# Altium PCB PotentiometerReceiverCircuit.PcbDoc
Units mil, origin at the board's own origin, x right, y up, seen from the top; angles counter-clockwise.
Board outline 6000 x 4000 mil, 2 copper layers (Top Layer, Bottom Layer); 34 components, 22 nets, 88 pads, 6 vias.
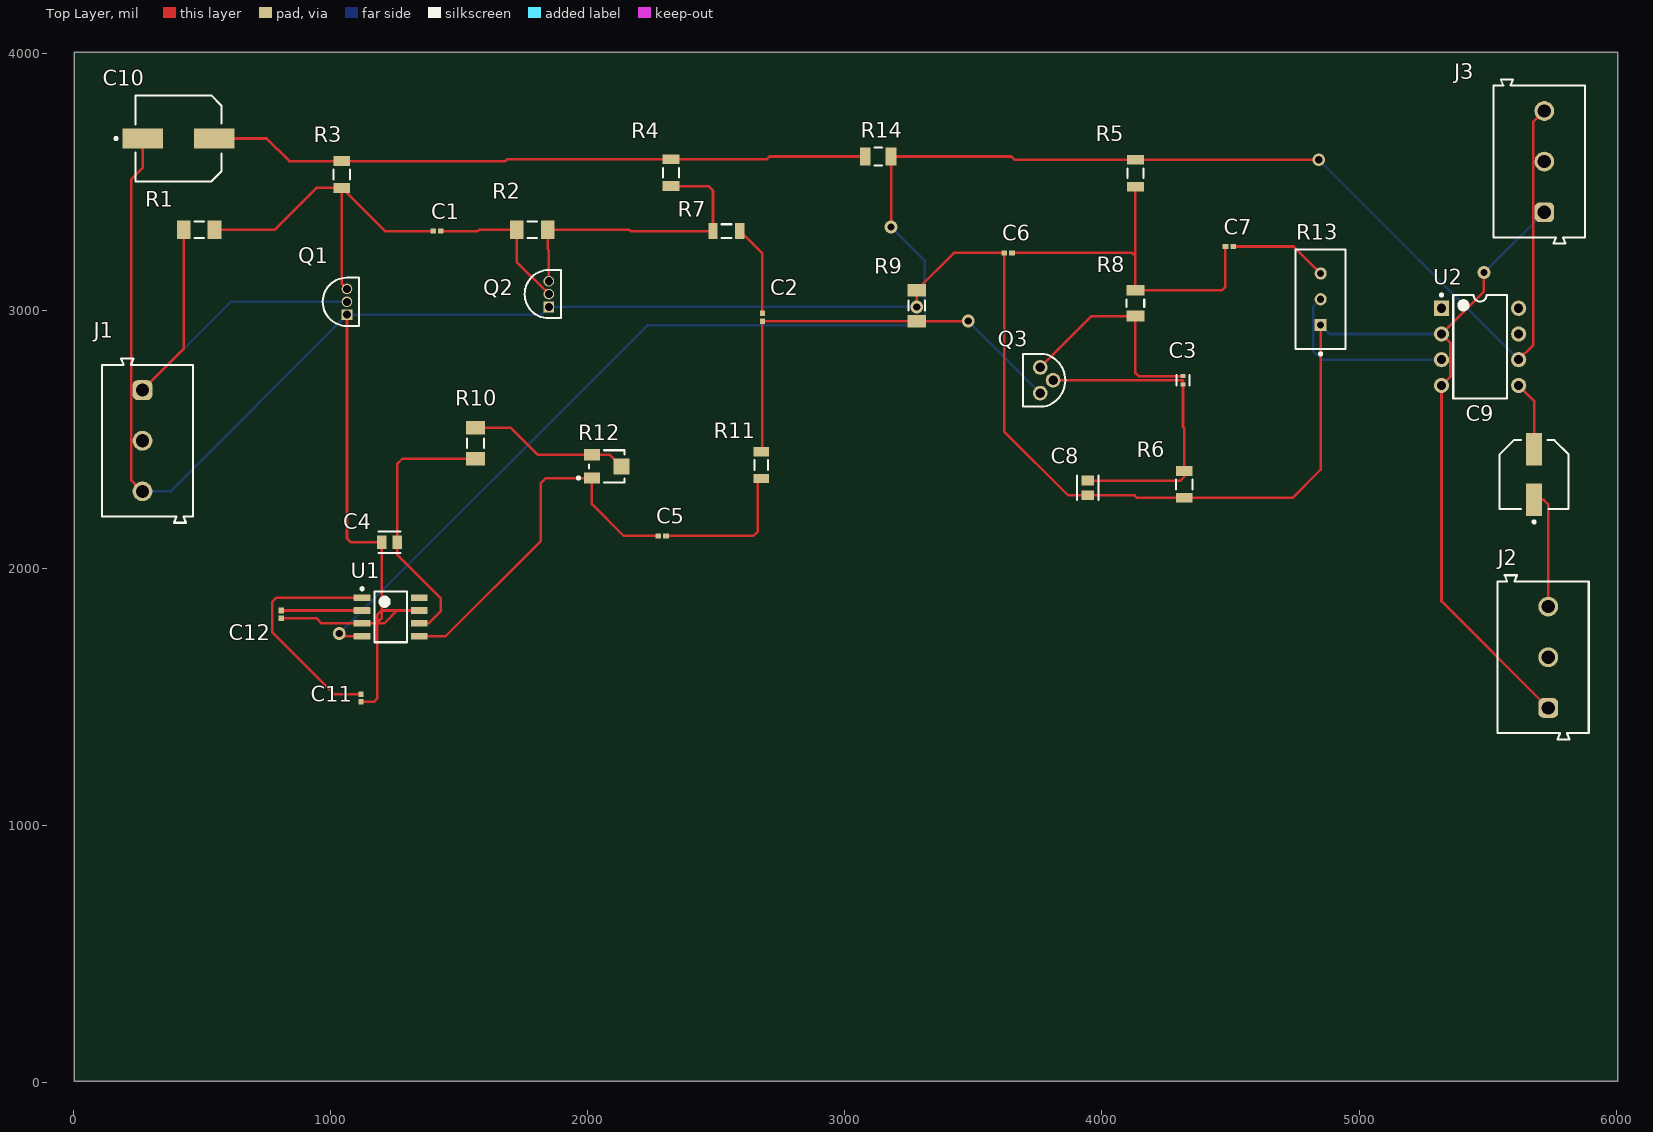
[diagram p0: Top Layer view]
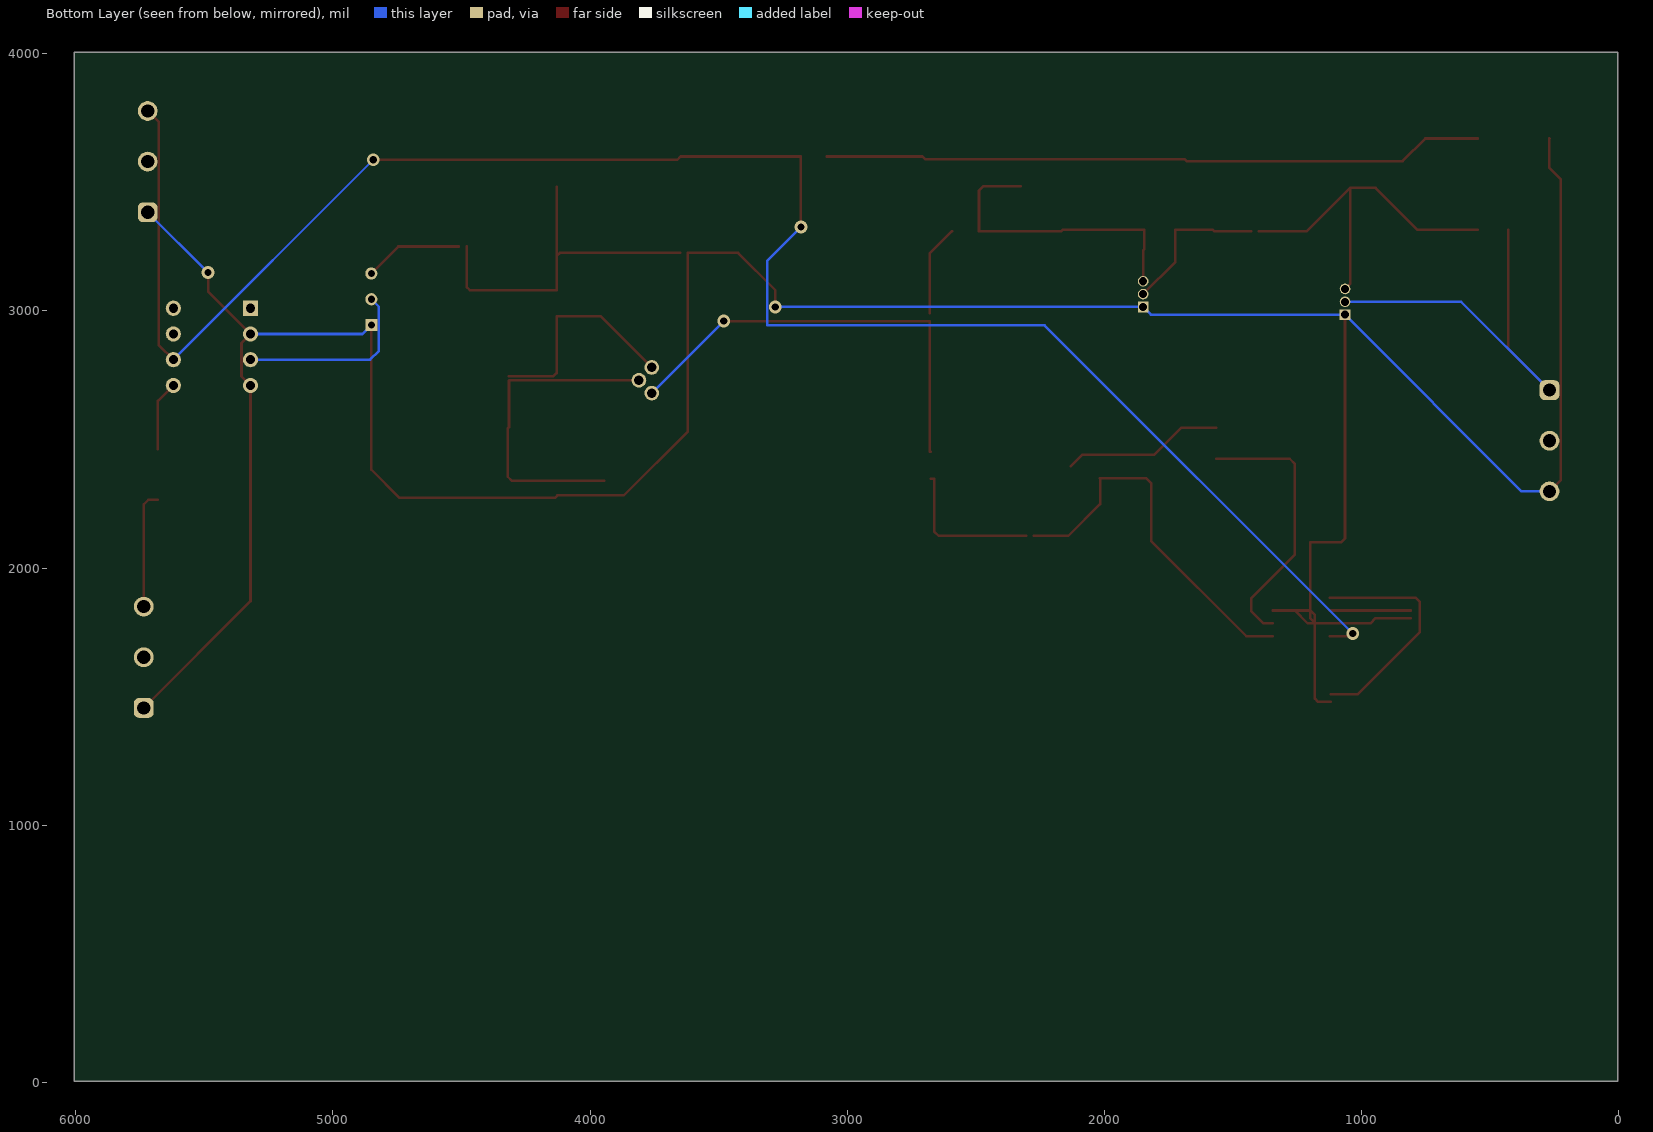
[diagram p1: Bottom Layer view, seen from below]
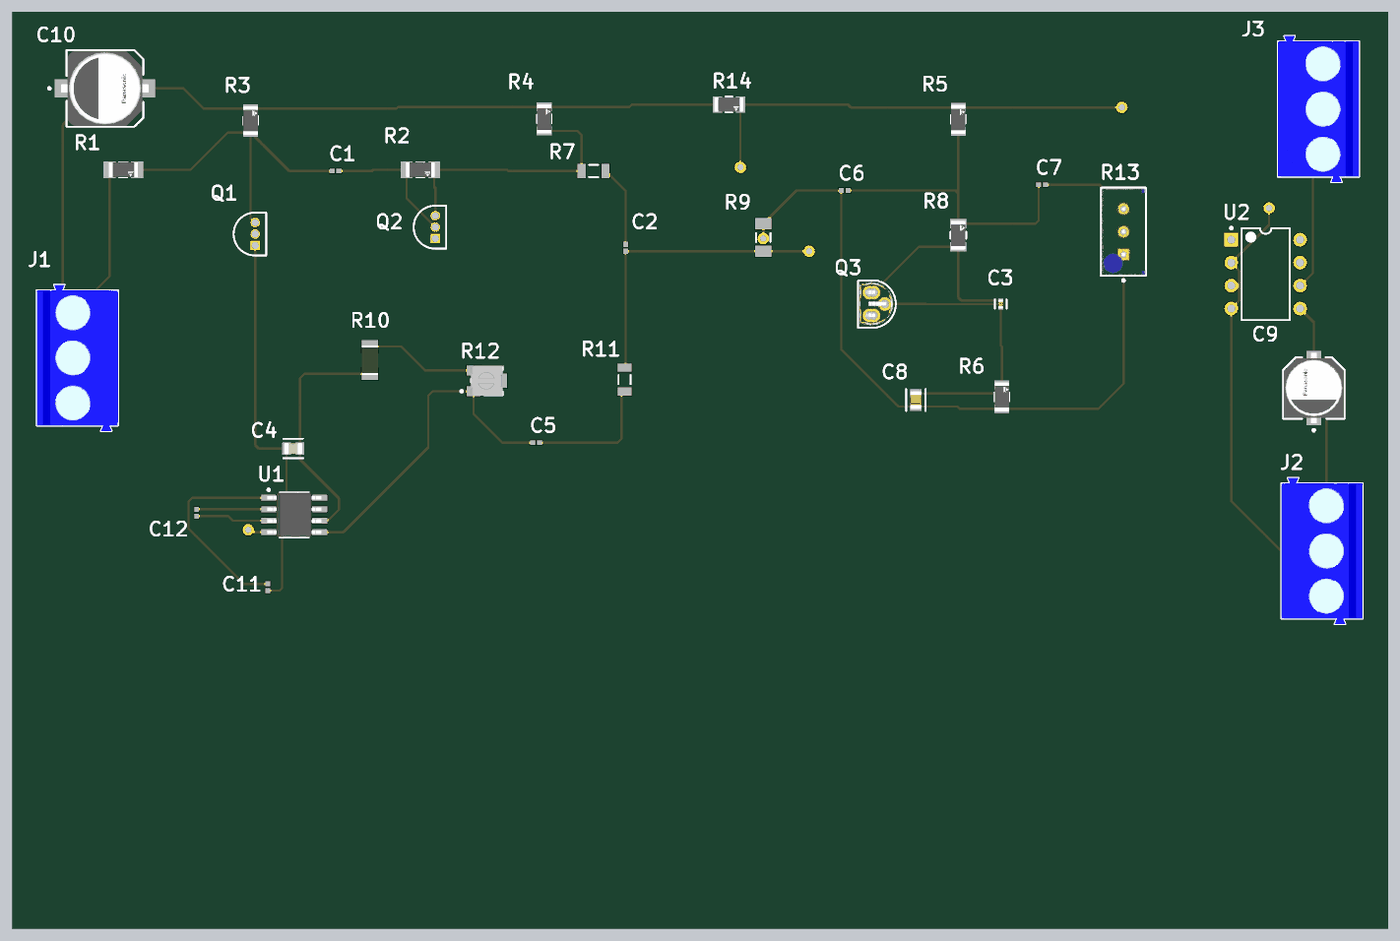
[diagram p2: 3D render of the assembled board from above, using the file's embedded part models]

## Layer stack, top to bottom
Top Solder: solder mask 0.4, Solder Resist, Dk 3.5
Top Layer: signal copper 1.4
Dielectric 1: dielectric 12.6, FR-4, Dk 4.8
Bottom Layer: signal copper 1.4
Bottom Solder: solder mask 0.4, Solder Resist, Dk 3.5

## Board outline
5,5 6005,5 6005,4005 5,4005

## Design rules (kind name [scope] priority, off if disabled: settings)
Clearance [All] p1: gap=0.25 ignorepadtopadclearanceinfootprint=FALSE
MinimumSolderMaskSliver [All] p1: minsoldermaskwidth=2
PolygonConnect [All] p1: connectstyle=Relief reliefconductorwidth=10 reliefentries=4 polygonreliefangle="90 Angle" airgapwidth=10
RoutingVias [All] p1: holewidth=28 width=50 viastyle="Through Hole" minholewidth=28 minwidth=50 maxholewidth=28 maxwidth=50
SolderMaskExpansion [All] p1: expansion=4 istentingtop=FALSE
Width [All] p1: maxlimit=10 minlimit=10 preferedwidth=10
29 further rules are at their usual default settings.

## Components (designator, comment, footprint, x,y, rotation, side; value= is the part's Value field where it differs from the comment)
C1 "C0402C103K5RACTU" CAPC1005X55X30LL05T10 1415,3310 r0 top
C2 "C0402C103K5RACTU" CAPC1005X55X30LL05T10 2680,2975.04 r90 top
C3 "GRM155R71H473KE14D" FP-GRM155-0_05-MFG 4315,2730 r270 top
C4 "C0805C222K5RACTU" FP-C0805C-DN-MFG 1230.47,2100 r0 top value="2,200 pF"
C5 "C0402C103K5RACTU" CAPC1005X55X30LL05T10 2290,2125 r0 top
C6 "C0402C104K4RACTU" CAPC1005X55X30LL05T10 3635.04,3225 r0 top
C7 "C0402C104K4RACTU" CAPC1005X55X30LL05T10 4495.04,3250 r0 top
C8 "GRM21BR61C106KE15L" FP-GRM21B-0_1-IPC_C 3945,2311.37 r90 top
C9 "EEEFP1V470AP" FP-FPD-MFG 5680,2363.43 r90 top
C10 "EEEFT1E471AP" FP-FTF-MFG 410,3670 r0 top
C11 "C0402C104K4RACTU" CAPC1005X55X30LL05T10 1120,1494.96 r90 top
C12 "C0402C104K4RACTU" CAPC1005X55X30LL05T10 810,1820 r90 top
J1 "691101710003" 691101710003 289.69,2494.99 r270 top
J2 "691101710003" 691101710003 5715.31,1653.16 r90 top
J3 "691101710003" 691101710003 5700,3580 r90 top
Q1 "2N3904BU" FAIR-TO-92 1065,2985 r90 top
Q2 "2N3904BU" FAIR-TO-92 1850,3015 r90 top
Q3 "J113" FP-135AN-MFG 3774.96,2730 r180 top
R1 "CRCW1206220KJNEA" FP-CRCW1206-e3-IPC_A 490.08,3315 r0 top
R2 "CRCW1206220KJNEA" FP-CRCW1206-e3-IPC_A 1785,3315 r0 top
R3 "CRCW12062K20FKEA" FP-CRCW1206-e3-IPC_C 1045,3530 r90 top
R4 "CRCW12062K20FKEA" FP-CRCW1206-e3-IPC_C 2325,3537.21 r90 top
R5 "CRCW12062K20FKEA" FP-CRCW1206-e3-IPC_C 4130,3535 r90 top
R6 "CRCW12062K20FKEA" FP-CRCW1206-e3-IPC_C 4320,2325 r90 top
R7 "ERJ-8ENF1001V" RESC3216X70X50LL05T20 2540,3310 r0 top
R8 "CRCW1206270RFKEA" FP-CRCW1206-e3-MFG 4130,3029.8 r90 top
R9 "RC1206FR-07100KL" RESC3116X65X40ML10T20 3280,3020 r90 top
R10 "CRCW12064K70FKEA" RESC3216X60X45ML15T20 1565,2485 r90 top
R11 "ERJ-8ENF1002V" RESC3216X70X50LL05T20 2675,2400 r90 top
R12 "3313J-1-503E" BOUR-3313J-1_V 2075,2395 r0 top
R13 "3296W-1-103LF" FP-3296W-MFG 4850,3045 r0 top
R14 "CRCW1206270RFKEA" FP-CRCW1206-e3-MFG 3130,3600 r0 top
U1 "LM567CM/NOPB" D0008A_M 1235,1810 r0 top
U2 "LM386N-1/NOPB" P0008A 5470,2860 r0 top

## Footprints (in the part's own frame and the unit in brackets; to place one, negate y for a bottom-side part, rotate by r counter-clockwise, add the part's x,y. Pads: shape width x height; smd on the part's side, far side on the other; paste and mask are expansions set on the pad)
691101710003 [mm] "5,00mm - modular - blue - Horizontal entry with pressure clamp - 12,6mm height - 03p"
  rrect50% 1.95x1.95 hole 1.3: 1(-5,-0.5)
  round 1.95 hole 1.3: 2(0,-0.5) 3(5,-0.5)
  silkscreen extent -8.1,-4.5 8.1,4.5, body extent -8.1,-4.5 8.1,4.5, height 12.65
BOUR-3313J-1_V [mm] "SMD, 3-Leads, Body 3.5x3.2mm, Pitch 1.15mm"
  rect 1.6x1.1 smd paste+0: 1(-1.45,-1.15) 3(-1.45,1.15)
  rect 1.6x1.6 smd paste+0: 2(1.45,0)
  silkscreen extent -2.92,-1.6 1.75,1.6, body extent -1.75,-1.65 1.75,1.65, height 2.11
CAPC1005X55X30LL05T10 [mm] "Chip Capacitor, 2-Leads, Body 1.00x0.50mm, IPC High Density"
  rect 0.56x0.52 smd: 1(-0.38,0) 2(0.38,0)
  body extent -0.53,-0.28 0.53,0.28, height 0.55
D0008A_M [mm] "SOIC, 8-Leads, Body 5x4mm, Pitch 1.27mm, IPC Low Density"
  rrect15% 1.65x0.65 smd: 1(-2.825,1.905) 2(-2.825,0.635) 3(-2.825,-0.635) 4(-2.825,-1.905) 5(2.825,-1.905) 6(2.825,-0.635) 7(2.825,0.635) 8(2.825,1.905)
  silkscreen extent -2.95,-2.5 1.6,2.9, body extent -3,-2.45 3,2.45, height 1.63
FAIR-TO-92 [mm] "TO, 3-Leads, Body Dia 4.79mm, Pitch 1.27mm"
  rect 1.05x1.05 hole 0.8 mask+0.05: 1(0,0)
  round 1.05 hole 0.8 mask+0.05: 2(1.27,0) 3(2.54,0)
  silkscreen extent -1.11,-1.21 3.65,2.4, body extent -1.11,-1.21 3.65,2.4, height 5.33
FP-135AN-MFG [mm]
  round 1.45 hole 0.95 paste-2539.97 mask+0: 1(0.38,-1.27) 2(-0.89,0) 3(0.38,1.27)
  silkscreen extent -2.1,-2.6 2.1,2.6, body extent -2.19,-2.7 2.19,2.7, height 0.25
FP-3296W-MFG [mm]
  rect 1.2x1.2 hole 0.7 paste-2539.97 mask+0: 1(0.005,-2.54)
  round 1.2 hole 0.7 paste-2539.97 mask+0: 2(0.005,0) 3(0.005,2.54)
  silkscreen extent -2.48,-5.52 2.48,4.89, body extent -2.58,-4.99 2.58,4.99, height 0.25
FP-C0805C-DN-MFG [mm]
  rect 0.95x1.35 smd paste+0 mask+0: 1(-0.75,0) 2(0.75,0)
  silkscreen extent -1.1,-1.07 1.1,1.07, body extent -1.4,-0.85 1.4,0.85, height 0.25
FP-CRCW1206-e3-IPC_A [mil]
  rect 53.39x73.16 smd paste+0 mask+0: 1(-60.08,0) 2(60.08,0)
  silkscreen extent -19,-31 19,31, body extent -106,-56 106,56, height 10
FP-CRCW1206-e3-IPC_C [mil]
  rect 37.64x65.28 smd paste+0 mask+0: 1(-52.21,0) 2(52.21,0)
  silkscreen extent -19,-31 19,31, body extent -75,-38 75,38, height 10
FP-CRCW1206-e3-MFG [mm]
  rect 1.05x1.8 smd paste+0 mask+0: 1(-1.275,0) 2(1.275,0)
  silkscreen extent -0.37,-0.87 0.37,0.87, body extent -1.9,-1 1.9,1, height 0.25
FP-FPD-MFG [mm]
  rect 3.2x1.6 smd paste+0 mask+0: 1(-2.5,0) 2(2.5,0)
  silkscreen extent -4.8,-3.4 3.4,3.4, body extent -4.35,-3.65 4.35,3.65, height 0.25
FP-FTF-MFG [mm]
  rect 4x2 smd paste+0 mask+0: 1(-3.55,0) 2(3.55,0)
  silkscreen extent -6.27,-4.25 4.25,4.25, body extent -5.8,-4.5 5.8,4.5, height 0.25
FP-GRM21B-0_1-IPC_C [mil]
  rect 37.71x49.69 smd paste+0 mask+0: 1(-28.63,0) 2(28.63,0)
  silkscreen extent -47,-42 47,42, body extent -51,-31 51,31, height 10
FP-GRM155-0_05-MFG [mm]
  rect 0.4x0.5 smd paste+0 mask+0: 1(-0.4,0) 2(0.4,0)
  silkscreen extent -0.5,-0.65 0.5,0.65, body extent -0.7,-0.38 0.7,0.38, height 0.25
P0008A [mm] "DIP, 8-Leads, Body 10.15x6.6mm, Pitch 2.54mm"
  rect 1.5x1.5 hole 0.9: 1(-3.81,3.81)
  round 1.5 hole 0.9: 2(-3.81,1.27) 3(-3.81,-1.27) 4(-3.81,-3.81) 5(3.81,-3.81) 6(3.81,-1.27) 7(3.81,1.27) 8(3.81,3.81)
  silkscreen extent -3.93,-5.1 2.65,5.23, body extent -3.95,-5.07 3.95,5.07, height 5.08
RESC3116X65X40ML10T20 [mm] "Chip Resistor, 2-Leads, Body 3.10x1.60mm, IPC Low Density"
  rect 1.25x1.8 smd: 1(-1.525,0) 2(1.525,0)
  silkscreen extent -0.5,-0.8 0.5,0.8, body extent -1.6,-0.85 1.6,0.85, height 0.65
RESC3216X60X45ML15T20 [mm] "Chip Resistor, 2-Leads, Body 3.3x1.75mm, IPC Low Density"
  rect 1.35x1.85 smd: 1(-1.525,0) 2(1.525,0)
  silkscreen extent -0.45,-0.82 0.45,0.82, body extent -1.65,-0.87 1.65,0.87, height 0.6
RESC3216X70X50LL05T20 [mm] "Chip Resistor, 2-Leads, Body 3.20x1.60mm, IPC High Density"
  rect 0.9x1.55 smd: 1(-1.325,0) 2(1.325,0)
  silkscreen extent -0.5,-0.67 0.5,0.67, body extent -1.63,-0.82 1.62,0.82, height 0.7

## Part data
C1 C2 C5: library part CMP-1034-01886-2, Manufacturer=Kemet, Part Number=C0402C103K5RACTU
C3: library part CMP-06035-009452-1, "Chip Multilayer Ceramic Capacitors for General Purpose, 0402, 47000pF, X7R, 15%, 10%, 50V", Capacitance=47nF, Case Code (Imperial)=0402, Case Code (Metric)=1005, Dielectric=X7R, Max Operating Temperature=125°C, Min Operating Temperature=-55°C, Package Quantity=10000, Resistor Type=Ceramic, Tolerance=10%, Voltage Rating=50V, Case/Package=0402, Height=0.5mm, Length=0.039inch, Mount="Surface Mount", Packaging="Tape and Reel", Termination=SMD/SMT, Thickness=0.022inch, Voltage Rating (DC)=50V, Weight=0.000212oz, Width=0.02inch
C4: library part CMP-2007-01168-2, "Multilayer Ceramic Capacitor, C Series, 2200 Pf, - 10%, X7R, 50 V, 0805 [2012 Metric] Rohs Compliant: Yes", Capacitance="2,200 pF", Manufacturer=KEMET, Package=C0805C-DN, Temperature="-55°C to +125°C", Temperature Characteristic=X7R, Temperature Coefficient=30ppm/°C, Temperature Range High=+125°C, Temperature Range Low=-55°C, Tolerance=0.1, Voltage Rating="50 V", Automotive=No, Category=Cap, ComponentLink2Description=Datasheet, ComponentLink2URL=https://content.kemet.com/datasheets/KEM_C1003_C0G_SMD.pdf, Device Class L1="Passive Components", Device Class L2=Capacitors, Device Class L3="Ceramic Capacitors", Digikey Description="Multilayer Ceramic Capacitor, C Series, 2200 Pf, - 10%, X7R, 50 V, 0805 [2012 Metric] Rohs Compliant: Yes", Height=0.88mm, Ipc Land Pattern Name=CAPC200125X78, Lead Free=Yes, Manufacturer Part Number=C0805C222K5RACTU, Material=Ceramic, Mouser Description="Multilayer Ceramic Capacitor, C Series, 2200 Pf, - 10%, X7R, 50 V, 0805 [2012 Metric] Rohs Compliant: Yes", Octopart=https://octopart.com/c0805c222k5ractu-kemet-99601, RoHS=TRUE
C6 C7 C11 C12: library part CMP-0001-00074-2, Manufacturer=Kemet, Part Number=C0402C104K4RACTU
C8: library part CMP-2007-03453-2, "Chip Multilayer Ceramic Capacitors for General Purpose, 0805, 10uF, X5R, 15%, 10%, 16V", Capacitance=10uF, Case Code (Imperial)=0805, Case Code (Metric)=2012, Dielectric=X5R, Max Operating Temperature=85°C, Min Operating Temperature=-55°C, Package Quantity=1, Tolerance=10%, Voltage=16V, Case/Package=0805, Depth=1.25mm, Height=1.25mm, Lead Free="Lead Free", Length=2mm, Material=Ceramic, Mount="Surface Mount", Packaging="Tape and Reel", Radiation Hardening=No, REACH SVHC="No SVHC", Termination=SMD/SMT, Thickness=0.053inch, Voltage Rating=16V, Voltage Rating (DC)=16V, Width=1.25mm
C9: library part CMP-2000-06216-2, "CAP ALUM 47UF 20% 35V SMD", Capacitance=47uF, Case/Package=Radial, ESR (Equivalent Series Resistance)=260mR, Leakage Current=3uA, Max Operating Temperature=105°C, Min Operating Temperature=-55°C, Package Quantity=1, Ripple Current=300mA, Tolerance=20%, Voltage=35V, Construction=Cylindrical, Contact Plating=Tin, Diameter=6.3mm, Dissipation Factor=0.12%, Height=5.8mm, Height - Seated (Max)=0.228inch, Lead Free="Lead Free", Lead Pitch=1.8mm, Length=5.8mm, Life (Hours)=2000Hour, Material=Aluminium, Mount="Surface Mount", Number of Pins=2, Packaging="Tape and Reel", Radiation Hardening=No, REACH SVHC="No SVHC", Ripple Current (AC)=300mA, RoHS Compliant=Yes, Series=FP, Termination=SMD/SMT, Voltage Rating=35V, Voltage Rating (DC)=35V
C10: library part CMP-05427-000040-1, "CAP ALUM 470UF 20% 25V SMD", Capacitance=470uF, Case/Package=Radial, Dielectric Material=Aluminium, ESR (Equivalent Series Resistance)=80mR, Leakage Current=117.5uA, Max Operating Temperature=105°C, Min Operating Temperature=-55°C, Package Quantity=500, Ripple Current=850mA, Tolerance=20%, Voltage=25V, Construction=Cylindrical, Contact Plating=Tin, Diameter=8mm, Features="General Purpose", Height=10.2mm, Height - Seated (Max)=0.413inch, Lead Diameter=0.9mm, Lead Free="Lead Free", Lead Pitch=3.1mm, Length=10.2mm, Life (Hours)=2000Hour, Mount="Surface Mount", Number of Pins=2, Packaging="Tape and Reel", Radiation Hardening=No, REACH SVHC="No SVHC", Ripple Current (AC)=850mA, RoHS Compliant=Yes, Series=FT, Termination=SMD/SMT, Voltage Rating=25V, Voltage Rating (DC)=25V
J1 J2 J3: library part CMP-1502-03257-2, Color=Blue, Current=16A, Max Operating Temperature=105°C, Min Operating Temperature=-40°C, Voltage=250V, Contact Material=Brass, Contact Plating=Tin, Current Rating=16A, Height=16.4mm, Housing Material=Nylon, Lead Pitch=5mm, Length=9mm, Mount="Through Hole", NexarPartId=8917705, Number of Contacts=3, Number of Levels=1, Number of Pins=3, Number of Positions Per Level=3, Packaging=Box, Pitch=5.0038mm, Plating=Steel, REACH SVHC=Unknown, RoHS=Compliant, Stripping Length=-7mm, Termination=Screw, Voltage Rating=250V, Width=16.2mm, Wire Gauge (Max)=26AWG, Wire Gauge (Min)=14AWG, Wire/Cable Gauge=26AWG
Q1 Q2: library part CMP-2000-04944-1, "NPN General-Purpose Amplifier, 40 V VCEO, 0.2 A, -55 to 150 degC, 2-Pin TO-92, RoHS, Bulk", Manufacturer=FairchildSemiconductor, Maximum Collector Base Voltage=60V, Maximum Collector Emitter Saturation Voltage=0.2@1mA@10mA, Maximum Collector Emitter Voltage=40V, Maximum DC Collector Current=0.2A, Maximum Operating Frequency=300(Min)MHz, Maximum Power Dissipation=625mW, Minimum DC Current Gain=40@0.1mA@1V, Operating Temperature=-55to150degC, Package=3TO-92, Package Description="3-Pin Transistor Outline Package, Body Dia 4.79 mm, Pitch 1.27 mm", Package Reference=TO-92, Category=GPBJT, Datasheet URL=https://datasheet.ciiva.com/4722/2n3904-82270-4722369.pdf, Datasheet Version="Rev. 1.1.0, 10/2014", Manufacturer URL=https://www.fairchildsemi.com/, Mounting=ThroughHole, Packaging=Bulk, Pin Count=3, Rad Hard=No, Type=NPN
Q3: library part CMP-07172-000004-1, "JFET N-CH 35V 625MW TO92", Breakdown Voltage=-35V, Continuous Drain Current=2mA, Drain To Source Resistance=100Ω, Manufacturer="ON Semiconductor", Max Junction Temp=+150°C, Package=135AN, Power Dissipation=625mW, Temperature="-55°C to +150°C", Temperature Range Low=-55°C, Automotive=No, Category=Trans, ComponentLink2Description=Datasheet, ComponentLink2URL=https://www.onsemi.com/pub/Collateral/MMBFJ113-D.PDF, Device Class L1="Discrete Semiconductors", Device Class L2=Transistors, Device Class L3=JFETs, Digikey Description="JFET N-CH 35V 625MW TO92", Footprint Url=https://www.onsemi.com/pub/Collateral/135AN.PDF, Gate To Source Voltage=-35V, Height=5.33mm, Lead Free=Yes, Manufacturer Part Number=J113, Mouser Description="J113 Series 35 V 2 mA Through Hole N-Channel Switch - TO-92", Number Of Channels=1, Number Of N Channels=1, Octopart=https://octopart.com/j113-on+semiconductor-84793417, RoHS=TRUE, Rthja Max=200°C/W, Temperature Range High=+150°C
R1 R2: library part CMP-2003-01955-2, "RES Thick Film, 220kΩ, 5%, 0.25W, 200ppm/°C, 1206", Case Code (Imperial)=1206, Case Code (Metric)=3216, Max Operating Temperature=155°C, Max Power Dissipation=250mW, Min Operating Temperature=-55°C, Package Quantity=1, Resistance=220kR, Temperature Coefficient=200ppm/°C, Tolerance=5%, Voltage Rating=200V, Case/Package=1206, Composition="Thick Film", Contact Plating=Tin, Depth=1.6mm, Features="Automotive AEC-Q200", Height=0.024inch, Lead Free="Lead Free", Length=3.2mm, Military Standard=Not, Number of Terminations=2, Packaging="Tape and Reel", Power Rating=250mW, Radiation Hardening=No, Termination=SMD/SMT, Voltage Rating (DC)=200V, Weight=0.000353oz, Width=0.063inch
R3 R4 R5 R6: library part CMP-2003-02034-2, "RES Thick Film, 2.2kΩ, 1%, 0.25W, 100ppm/°C, 1206", Case Code (Imperial)=1206, Case Code (Metric)=3216, Max Operating Temperature=155°C, Max Power Dissipation=250mW, Min Operating Temperature=-55°C, Package Quantity=10, Resistance=2.2kR, Temperature Coefficient=100ppm/°C, Tolerance=1%, Voltage Rating=200V, Case/Package=1206, Composition="Thick Film", Contact Plating=Tin, Depth=1.6mm, Features="Automotive AEC-Q200", Height=0.55mm, Lead Free="Lead Free", Length=3.2mm, Military Standard=Not, Number of Terminations=2, Packaging="Tape and Reel", Power Rating=250mW, Radiation Hardening=No, Termination=SMD/SMT, Voltage Rating (DC)=200V, Weight=0.000353oz, Width=1.6mm
R7: library part CMP-2003-00017-1, Manufacturer=Panasonic, Part Number=ERJ-8ENF1001V
R8 R14: library part CMP-2003-02006-2, "RES Thick Film, 270Ω, 1%, 0.25W, 100ppm/°C, 1206", Case Code (Imperial)=1206, Case Code (Metric)=3216, Max Operating Temperature=155°C, Max Power Dissipation=250mW, Min Operating Temperature=-55°C, Package Quantity=10, Resistance=270R, Resistance Tolerance=1%, Resistor Type="Thick Film", Temperature Coefficient=100ppm/°C, Voltage Rating=200V, Case/Package=1206, Construction=Rectangular, Contact Plating=Tin, Depth=1.6mm, Features="Automotive AEC-Q200", Height=0.55mm, Lead Free="Lead Free", Length=3.2mm, Military Standard=Not, Number of Terminations=2, Packaging="Tape and Reel", Power Rating=250mW, Radiation Hardening=No, Series=CRCW, Size Code=1206, Technology="THICK FILM", Termination=SMD/SMT, Tolerance=1%, Voltage Rating (DC)=200V, Weight=0.000353oz, Width=0.063inch
R9: library part CMP-2100-03674-1, "Chip Resistor, 100 KOhm, +/- 1%, 0.25 W, -55 to 155 degC, 1206 (3216 Metric), RoHS, Tape and Reel", Case Code (Imperial)=1206, Case Code (Metric)=3216, Manufacturer=Yageo, Max Operating Temperature=155degC, Min Operating Temperature=-55degC, Package Description="2-Pin Surface Mount Device, Body 3.1 x 1.6 mm", Package Reference=1206.0, Power Rating=250mW, Resistance=100KOhm, Temperature Coefficient=100ppm/degreesC, Tolerance=1%, Voltage Rating=200V, Case/Package=1206, Composition=ThickFilm, Datasheet URL=http://www.yageo.com/NewPortal/yageodocoutput?fileName=/pdf/R-Chip/PYu-RC_Group_51_RoHS_L_5.pdf, Datasheet Version="Rev. 5, 10/2016", Depth=1.6mm, Height=0.55mm, Lead Free=LeadFree, Length=3.1mm, Manufacturer URL=http://www.yageo.com/, Packaging=TapeandReel, REACH SVHC=NoSVHC, RoHSCompliant=true, Termination=SMD/SMT
R10: library part CMP-2100-03618-1, "Chip Resistor, 4.7 KOhm, +/- 1%, 0.25 W, -55 to 155 degC, 1206 (3216 Metric), RoHS, Tape and Reel", Case Code (Imperial)=1206, Case Code (Metric)=3216, Manufacturer="Vishay Semiconductor", Max Operating Temperature=155degC, Max Power Dissipation=250mW, Min Operating Temperature=-55degC, Package Description="2-Pin Surface Mount Device, Body 3.15 x 1.6 mm", Package Quantity=10, Package Reference=1206.0, Resistance=4.7KOhm, Temperature Coefficient=100ppm/degreesC, Tolerance=1%, Voltage Rating=200V, Case/Package=1206, Composition=ThickFilm, Contact Plating=Tin, Datasheet URL=http://www.vishay.com/docs/20035/dcrcwe3.pdf, Datasheet Version=41061.0, Depth=1.6mm, Height=0.55mm, Lead Free=LeadFree, Length=3.2mm, Manufacturer URL=http://www.vishay.com/, Military Standard=Not, Mount=SurfaceMount, Number of Terminations=2, Packaging=TapeandReel, Power Rating=250mW, Radiation Hardening=No, REACH SVHC=Unknown, RoHSCompliant=true, Termination=SMD/SMT, Voltage Rating (DC)=200V, Weight=0.000353oz, Width=1.6mm
R11: library part CMP-2003-00018-1, Manufacturer=Panasonic, Part Number=ERJ-8ENF1002V
R12: library part CMP-2000-05588-1, "3 mm Trimpot(R) Trimming Potentiometer, 50 KOhm, +/- 20%, 0.125 W, -55 to 125 degC, 3-Pin SMD, RoHS, Tape and Reel", Manufacturer=Bourns, Package Description="3-Pin Surface Mount Device, Body 3.5 x 3.2 mm, Pitch 1.15 mm", Package Reference=3313J-1, Power Rating=125mW, Resistance Tolerance=±20%, Temperature Coefficient=±150ppm/°C, Track Resistance=50kohm, Datasheet URL=http://www.bourns.com/docs/Product-Datasheets/3313.pdf, Datasheet Version=05/2016, Manufacturer URL=http://www.bourns.com/, Mounting Technology=SurfaceMount, No. of Turns=1, Potentiometer Mounting=SMD, SVHC=NoSVHC(19-Dec-2012)
R13: library part CMP-1747-00001-8, "TRIMMER 10K OHM 0.5W PC PIN TOP", Color=Blue, Insulation Resistance=1GR, Max Operating Temperature=125°C, Max Power Dissipation=500mW, Min Operating Temperature=-55°C, Package Quantity=50, Resistance=10kR, Resistance Tolerance=10%, Resistor Type=Cermet, Temperature Coefficient=100ppm/°C, Contact Plating=Tin, Depth=4.83mm, Height=11.55mm, Lead Free="Lead Free", Length=9.53mm, Military Standard=Not, Mount="Through Hole", Number of Turns=25, Packaging=Rail/Tube, Power Rating=500mW, Radiation Hardening=No, Reach SVHC Compliant=Yes, RoHS Compliant=Yes, Series=3296, Taper=Linear, Technology=CERMET, Termination=Pin, Tolerance=10%, Weight=0.03oz, Width=9.53mm
U1: library part CMP-0057-00373-6, "Tone Decoder, 8-pin Narrow SOIC, Pb-Free", Manufacturer="Texas Instruments", PackageTopMarking=NSZXTT*LM*567CM, PowerWise=N, Code_IPC=SOIC127P600-8, Code_JEDEC=MS-012-AA, ComponentLink1Description="Datasheet URL", ComponentLink1URL=http://www.ti.com/general/docs/lit/getliterature.tsp?genericPartNumber=LM567C&fileType=pdf, CompType="Audio IC", PackageDescription="SOIC Narrow, 4.9 x 3.9 x 1.45mm, 8 Lead, 1.27mm Pitch", PackageReference=D0008A, PinCount=8, RoHS=Y
U2: library part CMP-0057-00052-4, "Low Voltage Audio Power Amplifier, 8-pin MDIP, Pb-Free", Manufacturer="Texas Instruments", PackageTopMarking=NSUZXYTTE#*LM*386N-1, PowerWise=N, Code_JEDEC=MS-001-BA, ComponentLink1Description="Datasheet URL", ComponentLink1URL=http://www.ti.com/general/docs/lit/getliterature.tsp?genericPartNumber=LM386&fileType=pdf, CompType="Audio IC", PackageDescription="MDIP, .365 x .250 x .130in, 8 Lead, .100in Pitch", PackageReference=P0008A, PinCount=8, RoHS=Y

## Via types
v1: diameter 50, hole 28, Top Layer to Bottom Layer, 6 vias

## Nets (pads, with @x,y where several pads share a name; then routed paths per layer and width w, separated by ;. In a path a pad name is that pad's centre, name@x,y a point inside that pad or via, vN(x,y) a via of type N, cw(c..) or ccw(c..) an arc to the next point about the centre after c; other vN are vias at no path point)
+9: J3.3 R5.2 R14.2 U1.4 U2.6 | length 7350.5
  Top Layer w10: v1(1035,1745) 1045,1735 U1.4 ; v1(3180.2,3325.8) R14.2 3648,3600 3660.79,3587.21 R5.2 v1(4842.79,3587.21) ; U2.6 5676,2866 5676,3733.15 J3.3
  Bottom Layer w10: v1(1035,1745) 2233,2943 3311,2944 3311,3195 v1(3180.2,3325.8) ; v1(4842.79,3587.21) U2.6
GND: C4.1 C6.1 C8.1 C10.1 C11.1 C12.1 J1.3 J2.1 J3.1 Q1.1 Q2.1 R6.1 R9.2 R13.1 U1.3 U1.7 U2.2 U2.4 | length 12976.1
  Top Layer w10: J1.3 226,2342.15 226,3511 271,3556 271,3670 C10.1 ; C12.1 946,1805.04 966.04,1785 U1.3 1180.94,1785 ; Q1.1 1065,2115 1080,2100 C4.1 1200.94,1835 ; C11.1 1169.5,1480 1182,1492.5 1182,1785 ; U1.7 1260,1835 ; v1(3280,3015) R9.2 3424.96,3225 C6.1 3620.08,2531.66 3869,2282.74 C8.1 4127,2282.74 4136.95,2272.79 R6.1 4740.79,2272.79 4850.2,2382.2 R13.1 ; v1(5485,3148.45) 5485,3075 U2.2 5355,2875 5355,2745 U2.4 5320,1871.3 J2.1 ; 1180.94,1785 1182,1786.06 ; 1180.94,1785 1182,1785 ; 1182,1785 1182,1786.06 ; 1182,1785 1210,1785 1260,1835 ; 1182,1786.06 1200.94,1805 1200.94,1835 ; 1182,1786.06 1182,1817.5 1199.5,1835 1200.94,1835 ; 1200.94,1835 1260,1835
  Bottom Layer w10: J1.3 378.15,2298.15 Q1.1 1820,2985 Q2.1 v1(3280,3015) ; R13.1 4885.2,2910 U2.2 ; v1(5485,3148.45) J3.1
NetC1_1: C1.1 Q1.3 R1.2 R3.1 | length 1387.9
  Top Layer w10: R1.2 783.21,3315 946,3477.79 R3.1 ; Q1.3 1045,3105 R3.1 ; C1.1 1213.21,3310 1045.42,3477.79 R3.1
NetC1_2: C1.2 Q2.2 R2.1 | length 598.8
  Top Layer w10: C1.2 1574,3310 1579,3315 R2.1 1724.92,3190.08 Q2.2
NetC2_1: C2.1 Q3.3 R9.1 R11.2 | length 1708.9
  Top Layer w10: R11.2 2680,2452.17 C2.1 2979,2960.08 2979.12,2959.96 R9.1 v1(3480.04,2959.96)
  Bottom Layer w10: v1(3480.04,2959.96) Q3.3
NetC2_2: C2.2 R7.2 | length 356.4
  Top Layer w10: R7.2 2680,3222.17 C2.2
NetC3_1: C3.1 Q3.1 R8.1 | length 864.2
  Top Layer w10: Q3.1 3959.61,2979.61 R8.1 4130,2758.25 4142.5,2745.75 C3.1
NetC3_2: C3.2 C8.2 Q3.2 R6.2 | length 1262.3
  Top Layer w10: Q3.2 4315,2729 C3.2 4315,2548 4320,2543 R6.2 4320,2355 4305,2340 C8.2
NetC4_2: C4.2 R10.1 U1.6 | length 1059.3
  Top Layer w10: U1.6 1382,1785 1430,1833 1430,1882 1260,2052 C4.2 1260,2405 1279.96,2424.96 R10.1
NetC5_1: C5.1 R12.1 U1.5 | length 1468.2
  Top Layer w10: U1.5 1449,1735 1819,2105 1819,2330 1838.72,2349.72 R12.1@2017,2349.72 ; R12.1 R12.1@2017,2349.72 ; C5.1 2141,2125 2017,2249 R12.1@2017,2349.72
NetC5_2: C5.2 R11.1 | length 582.6
  Top Layer w10: C5.2 2644.5,2125 2662,2142.5 2662,2347.83 R11.1
NetC6_2: C6.2 C7.1 R5.1 R8.2 | length 1400.7
  Top Layer w10: C6.2 4117.5,3225 4130,3212.5 ; R5.1 4130,3212.5 ; C7.1 4480.08,3092.5 4467.58,3080 R8.2 4130,3212.5
NetC7_2: C7.2 R13.3 | length 383.7
  Top Layer w10: C7.2 4745.2,3250 R13.3
NetC9_2: C9.2 U2.5 | length 273
  Top Layer w10: U2.5 5680,2650 C9.2
NetC10_2: C10.2 R3.2 R4.2 R14.1 | length 2573.8
  Top Layer w10: C10.2 753,3670 840.79,3582.21 R3.2 1681,3582.21 1688.21,3589.42 R4.2 2697,3589.42 2707.58,3600 R14.1
NetC11_2: C11.2 U1.1 | length 919.4
  Top Layer w10: C11.2 1015.08,1509.92 774,1751 774,1867.5 791.5,1885 U1.1
NetC12_2: C12.2 U1.2 | length 313.8
  Top Layer w10: C12.2 956,1834.96 956.04,1835 U1.2
NetJ1_1: J1.1 Q1.2 R1.1 | length 1626.6
  Top Layer w10: J1.1 430,2851.85 R1.1
  Bottom Layer w10: J1.1 613.15,3035 Q1.2
NetQ2_3: Q2.3 R2.2 R4.1 R7.1 | length 1174.4
  Top Layer w10: Q2.3 1850,3235.49 1845.08,3240.4 R2.2 2163,3315 2168,3310 R7.1 2487.83,3467.5 2470.33,3485 R4.1
NetR10_2: R10.2 R12.2 R12.3 | length 629.2
  Top Layer w10: R10.2 1702.24,2545.04 1807,2440.28 R12.3 2086.81,2440.28 R12.2
NetR13_2: R13.2 U2.3 | length 726.2
  Bottom Layer w10: R13.2 4821,3015.8 4821,2844 4855,2810 U2.3
"Speaker input": C9.1 J2.3 | length 459.7
  Top Layer w10: C9.1 5717.5,2265 5735,2247.5 J2.3
pads on no net: J1.2 J2.2 J3.2 U1.8 U2.1 U2.7 U2.8